# Altium PCB CANable.PcbDoc
Units mil, origin at the board's own origin, x right, y up, seen from the top; angles counter-clockwise.
Board outline 1203 x 996.39 mil, 2 copper layers (Top Layer, Bottom Layer); 27 components, 18 nets, 121 pads, 17 vias.
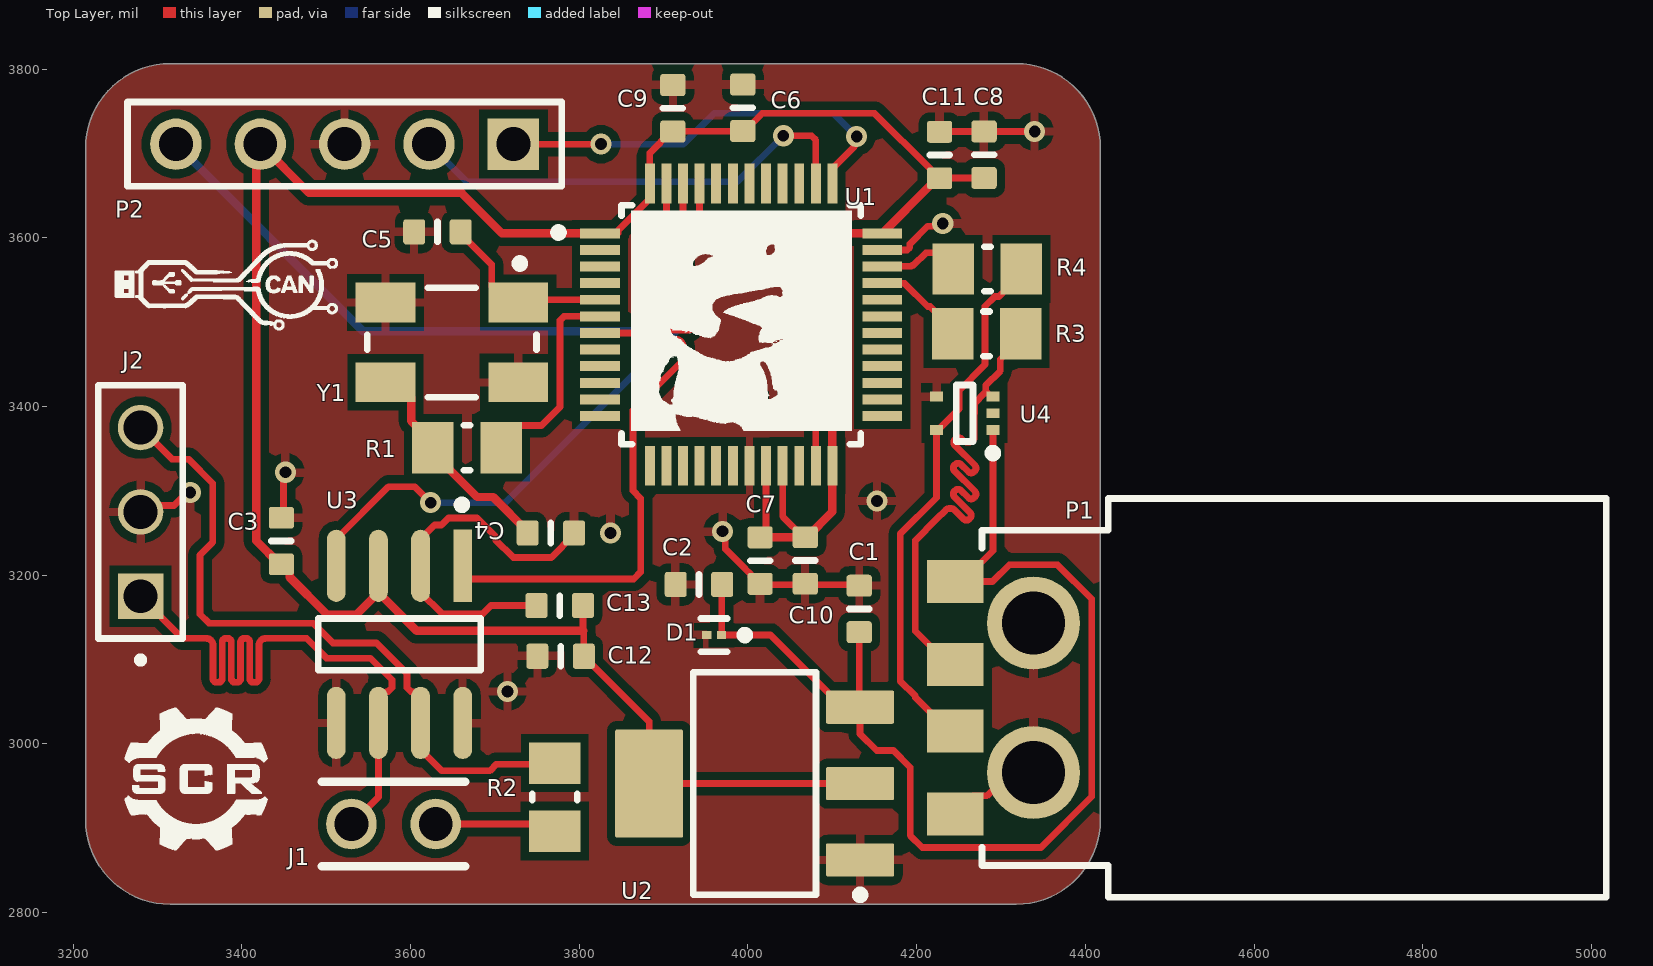
[diagram p0: Top Layer view]
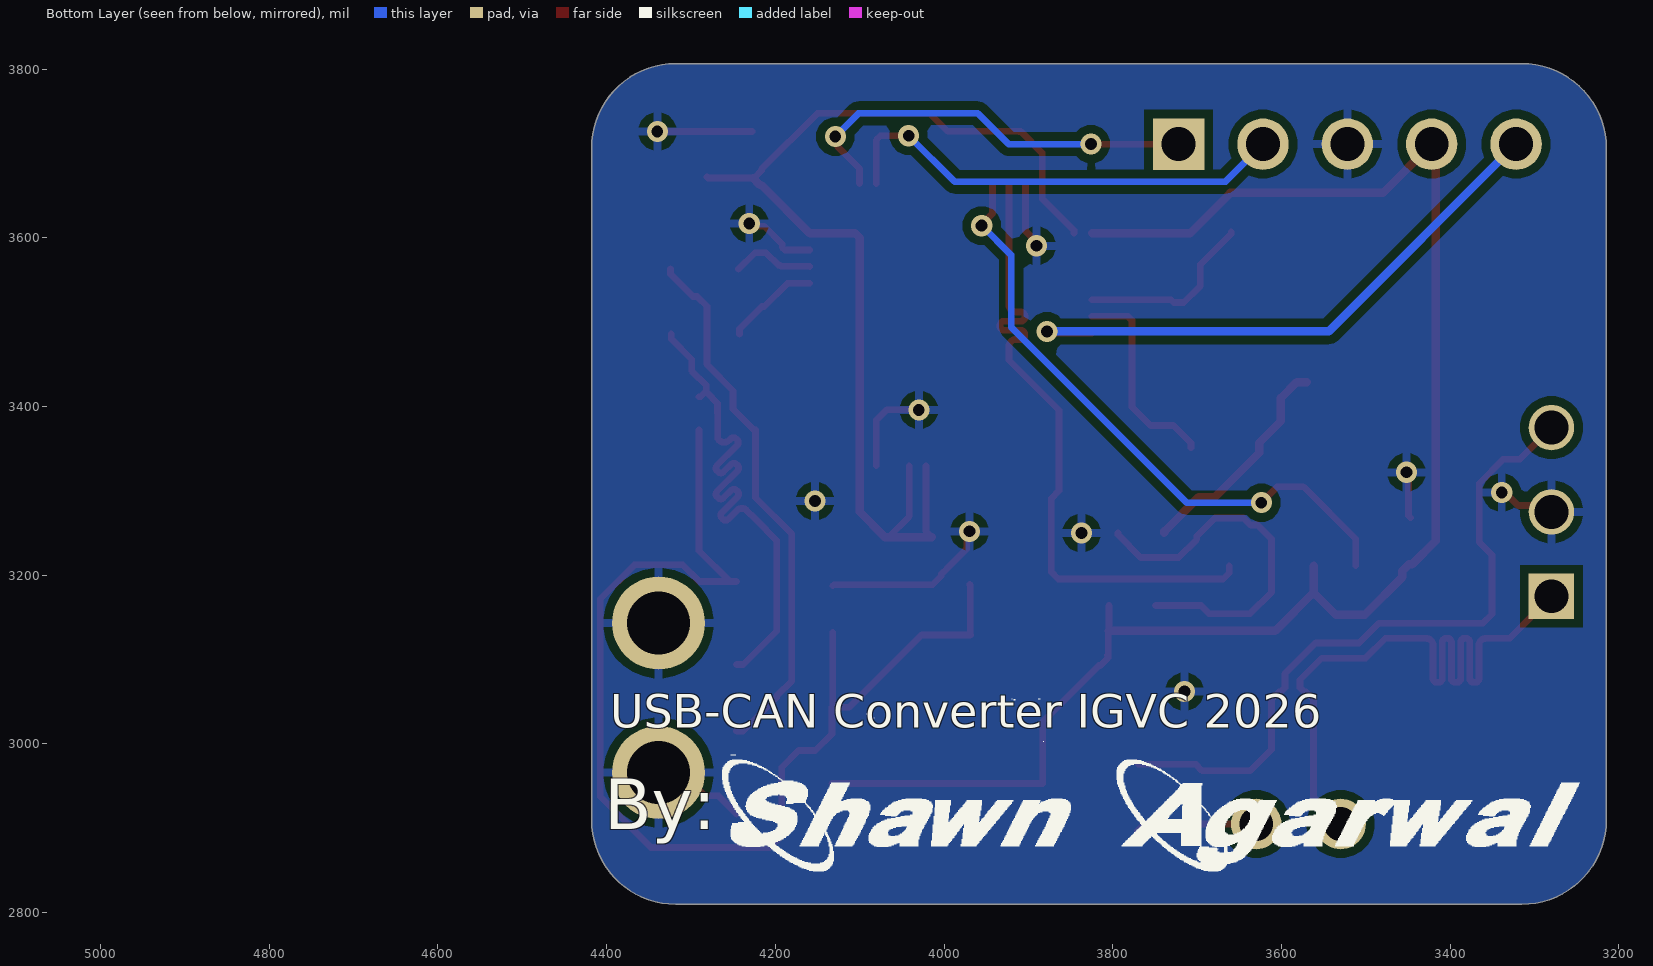
[diagram p1: Bottom Layer view, seen from below]
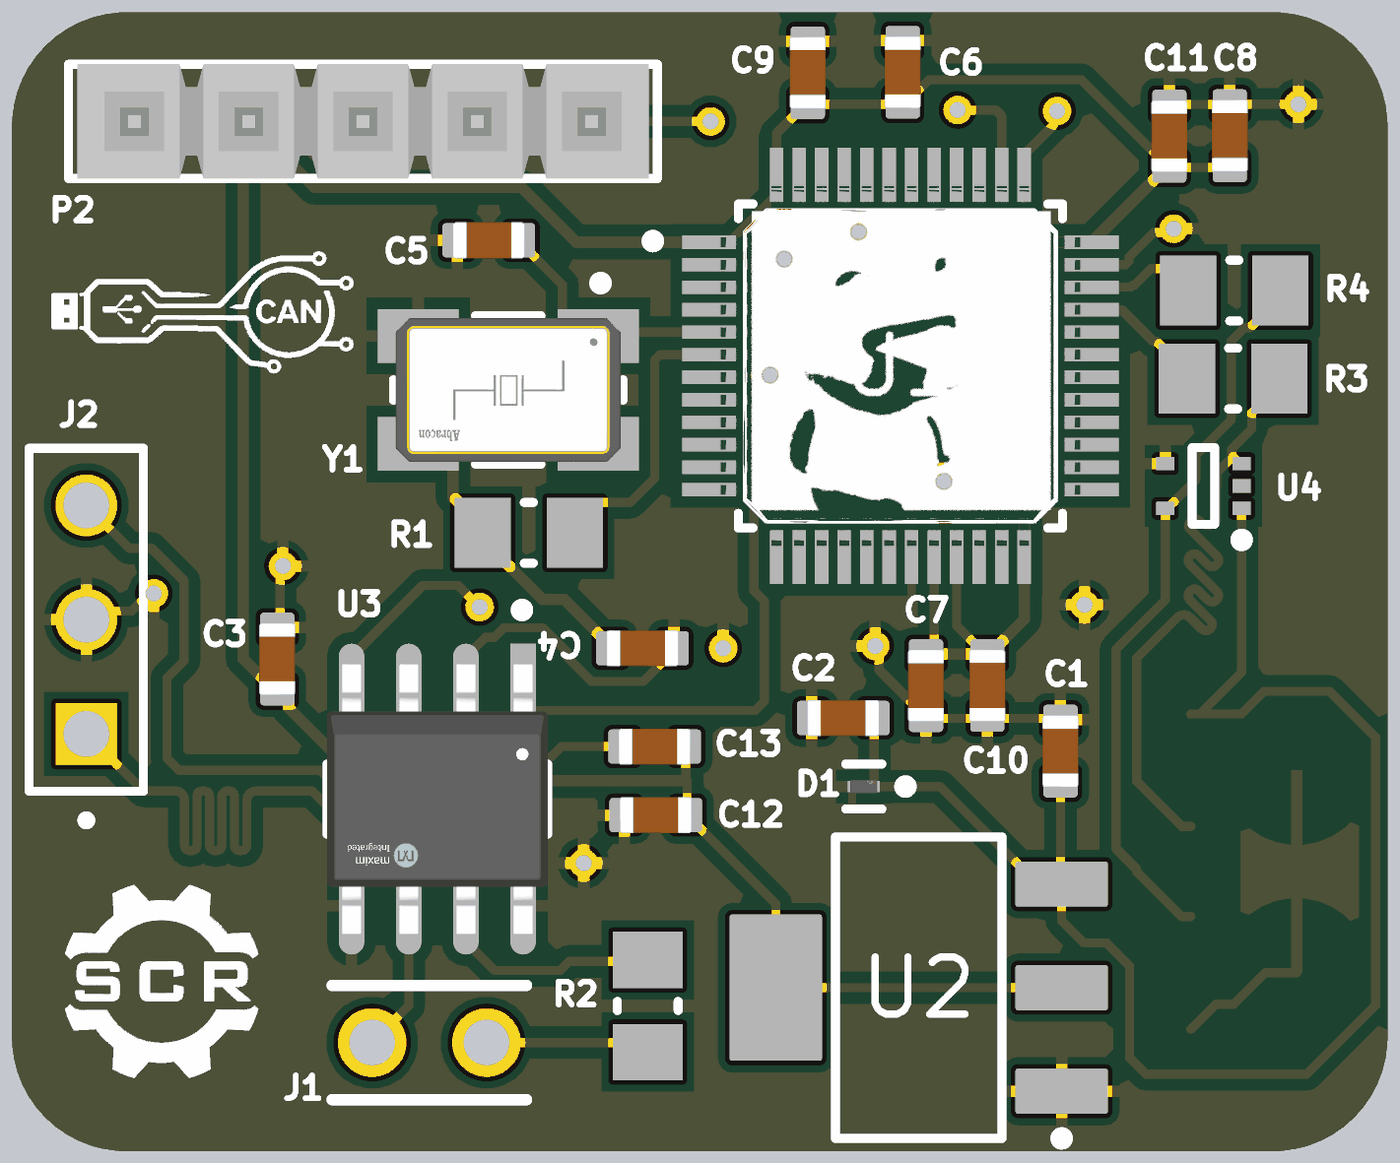
[diagram p2: 3D render of the assembled board from above, using the file's embedded part models]

## Layer stack, top to bottom
Top Solder: solder mask 0.4, Solder Resist, Dk 3.5
Top Layer: signal copper 1.4
Dielectric 1: dielectric 12.6, FR-4, Dk 4.8
Bottom Layer: signal copper 1.4
Bottom Solder: solder mask 0.4, Solder Resist, Dk 3.5

## Board outline
3215,2910 3215,3706.39 cw(c3315,3706.39) 3315,3806.39 4318,3806.39 cw(c4318,3706.39) 4418,3706.39 4418,2910 cw(c4318,2910) 4318,2810 3315,2810 cw(c3315,2910)

## Design rules (kind name [scope] priority, off if disabled: settings)
Clearance [All] p1: gap=10 ignorepadtopadclearanceinfootprint=FALSE
DiffPairsRouting [All] p1: maxlimit=10 minlimit=10 mostfreqgap=10 toplayer_minwidth=8 toplayer_maxwidth=12 toplayer_prefwidth=8 bottomlayer_minwidth=8 bottomlayer_maxwidth=12 bottomlayer_prefwidth=8 maxuncoupledlength=500
HoleSize [All] p1: absolutevalues=TRUE maxlimit=50 minlimit=1 maxpercent=80.000 minpercent=20.000
PolygonConnect [All] p1: connectstyle=Relief reliefconductorwidth=10 reliefentries=4 polygonreliefangle="90 Angle" airgapwidth=10
RoutingVias [All] p1: holewidth=28 width=50 viastyle="Through Hole" minholewidth=28 minwidth=50 maxholewidth=28 maxwidth=50
SolderMaskExpansion [All] p1: expansion=4 istentingtop=FALSE
SupplyNets "Schematic Supply Nets_2" [InNet('VBUS')] p1: voltage=0.000
SupplyNets "Schematic Supply Nets_1" [InNet('+3.3')] p2: voltage=0.000
SupplyNets "Schematic Supply Nets" [InNet('GND')] p3: voltage=0.000
Width [All] p1: maxlimit=10 minlimit=8 preferedwidth=8 minimp=50.000000 maximp=50.000000 favimp=50.000000 checkconnectedcopper=TRUE
28 further rules are at their usual default settings.

## Classes and differential pairs
component class U_Voltage_Regulator: C1 C2 C12 C13 U2
component class U_Microcontroller: C4 C5 C6 C7 C8 C9 C10 C11 R1 R3 R4 U1 Y1
component class U_Input_Output: D1 D2 J2 P2 U4
component class U_CAN_Transceiver: C3 J1 R2
differential pair NewDifferentialPair3: +NetU1_45 -NetU1_46
differential pair NewDifferentialPair2: +CANH -CANL
differential pair NewDifferentialPair1: +NetR4_2 -NetR3_2
differential pair D_USB: +D_USB_P -D_USB_N

## Components (designator, comment, footprint, x,y, rotation, side; value= is the part's Value field where it differs from the comment)
C1 "0.1uF" CAPC0603(1608)100_L 4132,3160 r90 top
C2 "10uF" CAPC0603(1608)100_L 3942,3189 r180 top
C3 "100nF" CAPC0603(1608)100_L 3447,3240.56 r270 top
C4 "22pF" CAPC0603(1608)100_L 3766.44,3250 r0 top
C5 "22pF" CAPC0603(1608)100_L 3632,3607 r180 top
C6 "100nF" CAPC0603(1608)100_L 3994,3754 r90 top
C7 "100nF" CAPC0603(1608)100_L 4014.42,3217.34 r270 top
C8 "100nF" CAPC0603(1608)100_L 4280.09,3698.49 r90 top
C9 "100nF" CAPC0603(1608)100_L 3911,3753.56 r90 top
C10 "100nF" CAPC0603(1608)100_L 4068,3217.44 r270 top
C11 "100nF" CAPC0603(1608)100_L 4227.23,3698.09 r90 top
C12 "10uF" CAPC0603(1608)100_L 3778,3104 r180 top
C13 "0.1uF" CAPC0603(1608)100_L 3777,3164 r180 top
D1 "ESD441DPLR" FP-DPL0002A-MFG 3960,3129 r180 top
J1 "2x1 Header" "0.1\" Header 2x1-Footprint" 3630,2905 r270 top
J2 "CAN" "3 pin 2.54mm header-Footprint-1" 3330,3125 r90 top
P1 "629004113921" 629004113921 4647.58,3054.63 r90 top
P2 "TSW-105-05-L-S" SMTC-TSW-105-05-X-S 3722,3711 r180 top (schematic designator P1)
R1 "RES 0805" RESC2013X50X30ML20T20 3667,3351 r0 top
R2 "120" RESC2013X50X30ML20T20 3771,2937 r90 top
R3 "RES 0805" RESC2013X50X30ML20T20 4283,3486 r180 top
R4 "RES 0805" RESC2013X50X30ML20T20 4284,3563 r180 top
U1 "STM32G431CBT6" FP-LQFP48-5B-MFG 3992,3497 r0 top
U2 "REG1117-3.3" DCY0004A_M 4008,2953 r180 top
U3 "MAX3051ESA+" FP-S8-4-IPC_B 3587,3118 r270 top
U4 "TPD2E001DRLRG4" DRL0005A_L 4257,3392 r180 top
Y1 "ABM3B-8.000MHZ-B2-T" FP-ABM3B-MFG 3649,3476 r180 top

## Footprints (in the part's own frame and the unit in brackets; to place one, negate y for a bottom-side part, rotate by r counter-clockwise, add the part's x,y. Pads: shape width x height; smd on the part's side, far side on the other; paste and mask are expansions set on the pad)
"0.1\" Header 2x1-Footprint" [mil]
  round 60 hole 40: 1(0,0) 2(0,-100)
  silkscreen extent -50,-135 50,35
"3 pin 2.54mm header-Footprint-1" [mm]
  rect 1.37x1.37 hole 1.02: 1(1.27,1.27)
  round 1.37 hole 1.02: 2(3.81,1.27) 3(6.35,1.27)
  silkscreen extent -0.75,0 7.62,2.54
629004113921 [mm] "USB 2.0 Plug Type A SMT with Clip"
  rect 1.3x1.7 smd: 1(3.5,10.2) 2(1,10.2) 3(-1,10.2) 4(-3.5,10.2)
  round 2.8 hole 1.9: Shell(-2.25,7.85) Shell(2.25,7.85)
  silkscreen extent -6,-9.4 6,9.4, body extent -6,-9.4 6,10.4, height 2.25
CAPC0603(1608)100_L [mm] "Chip Capacitor, Body 1.6x0.8mm, Height 1.0mm, IPC High Density"
  rrect25% 0.66x0.76 smd: 1(-0.7,0) 2(0.7,0)
  silkscreen extent 0,-0.3 0,0.3, body extent -0.8,-0.4 0.8,0.4, height 0.95
DCY0004A_M [mm] "SOT223, 4-Leads, Body 6.7x3.7mm, Pitch 2.3mm, IPC Low Density"
  rrect10% 2.05x1 smd: 1(-3.175,2.3) 2(-3.175,0) 3(-3.175,-2.3)
  rrect5% 2.05x3.25 smd: 4(3.175,0)
  silkscreen extent -3.3,-3.35 1.85,3.47
DRL0005A_L [mm] "SOT23, 5-Leads, Body 1.7x1.3mm, Pitch 0.5mm, IPC High Density"
  rect 0.4x0.3 smd: 1(-0.85,0.5) 2(-0.85,0) 3(-0.85,-0.5) 4(0.85,-0.5) 5(0.85,0.5)
  silkscreen extent -0.98,-0.85 0.25,1.32, body extent -0.65,-0.85 0.65,0.85, height 0.6
FP-ABM3B-MFG [mm]
  rect 1.8x1.2 smd paste+0 mask+0: 1(-2,-1.2) 2(2,-1.2) 3(2,1.2) 4(-2,1.2)
  silkscreen extent -2.55,-2.5 2.55,1.65, body extent -3,-1.9 3,1.9, height 0.25
FP-DPL0002A-MFG [mm]
  rect 0.28x0.25 smd paste+0 mask+0: 1(-0.22,0) 2(0.22,0)
  silkscreen extent -1.05,-0.5 0.4,0.5, body extent -0.46,-0.28 0.46,0.28, height 0.25
FP-LQFP48-5B-MFG [mm]
  rect 1.2x0.3 smd paste+0 mask+0: 1(-4.25,2.75) 2(-4.25,2.25) 3(-4.25,1.75) 4(-4.25,1.25) 5(-4.25,0.75) 6(-4.25,0.25) 7(-4.25,-0.25) 8(-4.25,-0.75) 9(-4.25,-1.25) 10(-4.25,-1.75) 11(-4.25,-2.25) 12(-4.25,-2.75) 25(4.25,-2.75) 26(4.25,-2.25) 27(4.25,-1.75) 28(4.25,-1.25) 29(4.25,-0.75) 30(4.25,-0.25) 31(4.25,0.25) 32(4.25,0.75) 33(4.25,1.25) 34(4.25,1.75) 35(4.25,2.25) 36(4.25,2.75)
  rect 0.3x1.2 smd paste+0 mask+0: 13(-2.75,-4.25) 14(-2.25,-4.25) 15(-1.75,-4.25) 16(-1.25,-4.25) 17(-0.75,-4.25) 18(-0.25,-4.25) 19(0.25,-4.25) 20(0.75,-4.25) 21(1.25,-4.25) 22(1.75,-4.25) 23(2.25,-4.25) 24(2.75,-4.25) 37(2.75,4.25) 38(2.25,4.25) 39(1.75,4.25) 40(1.25,4.25) 41(0.75,4.25) 42(0.25,4.25) 43(-0.25,4.25) 44(-0.75,4.25) 45(-1.25,4.25) 46(-1.75,4.25) 47(-2.25,4.25) 48(-2.75,4.25)
  silkscreen extent -5.62,-3.6 3.6,3.6, body extent -4.95,-4.95 4.95,4.95, height 0.25
FP-S8-4-IPC_B [mil]
  rect 85.59x22.32 smd paste+0 mask+0: 1(-93.15,75)
  rrect100% 85.59x22.32 smd paste+0 mask+0: 2(-93.15,25) 3(-93.15,-25) 4(-93.15,-75) 5(93.15,-75) 6(93.15,-25) 7(93.15,25) 8(93.15,75)
  silkscreen extent -170,-96 31,96, body extent -146,-106 146,106, height 10
RESC2013X50X30ML20T20 [mm] "Chip Resistor, 2-Leads, Body 2.00x1.25mm, IPC Low Density"
  rect 1.25x1.55 smd: 1(-1.025,0) 2(1.025,0)
  silkscreen extent -0.1,-0.67 0.1,0.67, body extent -1.1,-0.72 1.1,0.72, height 0.5
SMTC-TSW-105-05-X-S [mm] ".025 SQ Post Terminal Strip Assembly, 1x5 Pins, Vertical, 2.54mm Pitch, Male"
  rect 1.55x1.55 hole 1.02: 1(0,0)
  round 1.55 hole 1.02: 2(2.54,0) 3(5.08,0) 4(7.62,0) 5(10.16,0)
  silkscreen extent -1.46,-1.27 11.62,1.27, body extent -1.27,-1.27 11.43,1.27, height 5.21

## Part data
C1 C2 C3 C4 C5 C6 C7 C8 C9 C10 C11 C12 C13: library part CMP-001-00083-4, "GENERIC CAPACITOR 0805 or 0603(1608)"
D1: library part CMP-00370-140306675-1, "ESD441DPLR 1-pF, 5.5-V, 30-KV ESD protection device in 0201 package 2-X2SON -40 to 125", Ambient Temperature Range High=150°C, Breakdown Voltage=6V, Capacitance=1pF, Clamping Voltage=3.8V, Manufacturer Lifecycle Status=ACTIVE, Max Operating Temperature=125°C, Min Operating Temperature=-40°C, Peak Pulse Current=6A, Peak Pulse Power=45W, Reverse Standoff Voltage=5.5V, Direction=Unidirectional, Height=320µm, Length=600µm, Lifecycle Status=Production, NexarPartId=140306675, Number of Channels=1, Number of Pins=2, Thickness=300µm, Width=300µm
J1: library part CMP-002-00002-10, "Board Connector, 2 Contact(s), 1 Row(s), Male, Straight, 0.1 inch and 0.079 inch Pitch, Solder Terminal, Locking, Black Insulator", Connector Type="BOARD CONNECTOR", Mounting Technology=Board, RoHS Compliant=Yes
J2: library part CMP-002-00074-2, "3 pin header for jumpers connectors 2.54mm pitch."
P1: library part CMP-1502-03242-2, Contact Resistance=20mΩ, Current Rating=1.5A, Insulation Resistance=1GΩ, Max Operating Temperature=105°C, Min Operating Temperature=-40°C, Operating Supply Voltage=30V, Connector Type=USB, Contact Plating=Gold, Features=Shielded, Gender=Male, Lead Free="Lead Free", Length=18.8mm, Mount="Horizontal, Surface Mount", NexarPartId=19991169, Number of Contacts=4, Number of Pins=4, Orientation=Horizontal, REACH SVHC=Unknown, RoHS=Compliant, Termination=SMD/SMT, USB Standard="USB 2.0"
P2: library part CMP-1024-00366-1, "0.025\" SQ Post Header, Through-hole, Vertical, -55 to 125 degC, 2.54 mm Pitch, 5-Pin, Male, RoHS", Manufacturer=Samtec, Temperature Range="-55 to 125 degC", ComponentLink1Description="Manufacturer URL", ComponentLink1URL=http://www.samtec.com, ComponentLink2Description=Datasheet, ComponentLink2URL=http://www.samtec.com/documents/webfiles/pdf/TSW_TH.PDF, ComponentLink3Description="Package Specification", ComponentLink3URL=http://www.samtec.com/documents/webfiles/cpdf/TSW-XXX-XX-XXX-X-XX-XXX-MKT.pdf, DatasheetVersion=F-214, Mounting Technology=Through-hole, Orientation=Vertical, PackageDescription=".025[0.64] SQ. Post Terminal Strip Assembly", PackageReference=TSW-105-05-X-S, PackageVersion="DM, 8/1988", PartNumber=TSW-105-05-L-S, Pitch="2.54 mm", RoHS=True
R1 R2 R3 R4: library part CMP-009-00177-4, "Surface Mount 0805 Resistor"
U1: library part CMP-12105-000030-1, "MAINSTREAM ARM CORTEX-M4+ MCU 17", Ambient Temperature Range High=+85°C, Ambient Temperature Range Low=-40°C, Frequency=170MHz, Manufacturer=STMicroelectronics, Max Junction Temp=+105°C, Max Supply Voltage=3.6V, Min Supply Voltage=1.62V, Package=LQFP48-5B, Temperature="-40°C to +85°C", Automotive=No, Category=IC, ComponentLink2Description=Datasheet, ComponentLink2URL=https://www.st.com/resource/en/datasheet/stm32g431cb.pdf, Core Architecture="Arm Cortex-M4", Data Bus Width=32bits, Device Class L1="Integrated Circuits (ICs)", Device Class L2="Embedded Processors and Controllers", Device Class L3=Microcontrollers, Digikey Description="MAINSTREAM ARM CORTEX-M4+ MCU 17", Height=1.6mm, Interface=I2C,SPI,UART,USART,CAN,USB,LIN,IrDA,I2S, Lead Free=Yes, Manufacturer Part Number=STM32G431CBT6, Memory Size=128KBytes, Memory Type=FLASH, Number of A/D Converters=1, Number of ADC Channels=17, Number Of Cores=1, Number of I2C Channels=3, Number of I/Os=38, Number of PWM Channels=31, Number of SPI Channels=3, Number of Timers/Counters=14, Number of UART Channels=4, Number Of Usb Channels=1, Octopart=https://octopart.com/stm32g431cbt6-stmicroelectronics-98835224, RAM Size=32KBytes, RoHS=TRUE, Standoff Height=0.05mm, Temperature Range High=+85°C, Temperature Range Low=-40°C
U2: library part CMP-019-00049-4, "LDO Regulator Pos 3.3V 0.8A 4-Pin(3+Tab) SOT-223 Rail"
U3: library part CMP-015-00014-1, "MAX3051 Series 3.3 V 1 Mbps Low-Supply-Current CAN Transceiver - SOIC-8"
U4: library part CMP-0326-00050-2, "Low-Capacitance + / - 15 kV ESD-Protection Array for High-Speed Data Interfaces, 2 Channels, -40 to +85 degC, 5-pin SOT (DRL), Green (RoHS & no Sb/Br)", Breakdown Voltage(Min)(V)=11, IO Capacitance(Typ)(pF)=1.5, IO Leakage Current(nA)=1, Manufacturer="Texas Instruments", ComponentLink1Description="Manufacturer URL", ComponentLink1URL=http://www.ti.com/, ComponentLink2Description=Datasheet, ComponentLink2URL=http://www.ti.com/general/docs/lit/getliterature.tsp?genericPartNumber=TPD2E001&fileType=pdf, ComponentLink3Description="URL Link1", ComponentLink3URL=SamplesURL:http://www.ti.com/product/tpd2e001#samples, DatasheetVersion=SLLS684F, Eco-Plan="Green (RoHS & no Sb/Br)", IEC 61000-4-2 Air-Gap(+/- kV)=15, IEC 61000-4-2 Contact(+/- kV)=8, Mounting Technology="Surface Mount", PackageDescription="5-Pin Plastic Small Outline, Flat Lead 0.5 mm Pitch", PackageReference=DRL0005A, PackageVersion="revD, Aug-2007", PartNumber=TPD2E001DRLRG4, SubFamily="ESD Solution", USB High Speed=TRUE
Y1: library part CMP-1688-00002-2, "Crystal 8MHz ±20ppm 18pF SMD-4 5mm x 3.2mm", Case/Package=CSMD, ESR (Equivalent Series Resistance)=200R, Frequency=8MHz, Frequency Stability=50ppm, Frequency Tolerance=20ppm, Load Capacitance=18pF, Max Operating Temperature=70°C, Min Operating Temperature=-20°C, Operating Frequency="8 MHz", Package Quantity=1000, Resistor Type=Ceramic, Depth=3.2mm, Height=0.043inch, Lead Free="Lead Free", Length=5mm, Mount="Surface Mount", Number of Pins=4, Packaging="Tape and Reel", Series=ABM3B, Series Resistance=200R, Termination=SMD/SMT, Tolerance=20ppm, Width=0.126inch

## Via types
v1: diameter 25, hole 14, Top Layer to Bottom Layer, 17 vias

## Nets (pads, with @x,y where several pads share a name; then routed paths per layer and width w, separated by ;. In a path a pad name is that pad's centre, name@x,y a point inside that pad or via, vN(x,y) a via of type N, cw(c..) or ccw(c..) an arc to the next point about the centre after c; other vN are vias at no path point)
+3.3: C3.2 C6.1 C7.1 C8.1 C9.1 C10.1 C11.1 C12.1 C13.1 P2.4 U1.1 U1.20 U1.21 U1.24 U1.36 U1.48 U2.2 U2.4 U3.3 | length 3225.6
  Top Layer w8: C13.1 3804.56,3134.08 3804.6,3134.04 3805.56,3133.08 C12.1 C12.1@3806.56,3105 ; C12.1@3805.56,3102.04 3814.56,3093.04 3816.52,3093.04 3883,3026.56 U2.4 U2.2 ; U1.1@3846,3605.49 3846,3608.87 3883.73,3646.61 U1.48 ; U1.48@3883.73,3662.35 U1.48 ; C7.1 4021.53,3252.01 U1.20 ; U1.21 4041.21,3269.83 C10.1@4066.04,3245 ; C11.1@4226.71,3670.73 4279.89,3670.73 C8.1@4281.13,3671.96 ; C11.1 4225.27,3670.53 4216.27,3679.53 4216.27,3681.49 4150.26,3747.5 4017.02,3747.5 3995.74,3726.22 3911.22,3726.22 C9.1 3909.04,3726 3883.73,3700.69 U1.48
  Top Layer w10: U3.3 U3.3@3562,3179.51 ; 3804.6,3134.04 3607.47,3134.04 U3.3@3562,3179.51 ; U1.1 3708.56,3605.27 3660.58,3653.25 3479.75,3653.25 P2.4 3417.04,3706.04 3417.04,3241 3445.04,3213 C3.2 3448.96,3213 3456.96,3205 3456.96,3197.56 3501.16,3153.36 3535.84,3153.36 U3.3@3562,3179.51 ; C7.1 4014.47,3244.95 C10.1 C10.1 ; C10.1@4069.96,3245 4100.27,3275.31 U1.24 4100.27,3600.27 4105.27,3605.27 U1.36 4216.59,3662.53 4218.51,3662.53 C11.1@4226.71,3670.73
CANH: J2.3 R2.2 U3.7 | length 820.3
  Top Layer w8: J2.3 3317.41,3337.59 3336.88,3337.59 3365.5,3308.98 3365.5,3239 3350.5,3224 3350.5,3153.69 3361.07,3143.12 3484.53,3143.12 3507.97,3119.68 3559.84,3119.68 3596,3083.52 3596,3066.61 3600.69,3061.92 3602.69,3061.92 3612,3052.61 3612,2993.21 3637.16,2968.05 3694.06,2968.05 3702.01,2976 3769.65,2976 R2.2
CANL: J1.2 J2.1 U3.6 | length 818.3
  Top Layer w8: J2.1 3329.88,3125.12 3343,3125.12 3357.9,3125.12 cw(c3357.9,3117.12) 3365.9,3117.12 3365.9,3077.35 ccw(c3370.26,3077.35) 3370.26,3072.99 3372.44,3072.99 ccw(c3372.44,3077.35) 3376.8,3077.35 3376.8,3120.76 cw(c3381.16,3120.76) 3381.16,3125.12 3383.34,3125.12 cw(c3383.34,3120.76) 3387.7,3120.76 3387.7,3077.35 ccw(c3392.06,3077.35) 3392.06,3072.99 3394.24,3072.99 ccw(c3394.24,3077.35) 3398.6,3077.35 3398.6,3120.76 cw(c3402.96,3120.76) 3402.96,3125.12 3405.14,3125.12 cw(c3405.14,3120.76) 3409.5,3120.76 3409.5,3077.35 ccw(c3413.86,3077.35) 3413.86,3072.99 3416.04,3072.99 ccw(c3416.04,3077.35) 3420.4,3077.35 3420.4,3117.12 cw(c3428.4,3117.12) 3428.4,3125.12 3456.74,3125.12 3477.08,3125.12 3500.51,3101.68 3552.38,3101.68 3578,3076.07 3578,3066.61 3573.31,3061.92 3571.31,3061.92 3562,3052.61 3562,2937 J1.2
CLK_IN: C5.1 U1.5 Y1.1 | length 217.2
  Top Layer w8: C5.1 3659.56,3605.04 3696.31,3568.29 3696.31,3542.87 3715.93,3523.24 Y1.1 3731.02,3526.53 U1.5
CLK_OUT: R1.2 U1.6 | length 245.6
  Top Layer w8: R1.2 3707.35,3356.91 3727.96,3377.51 3755.35,3377.51 3777.17,3399.34 3777.17,3502.16 3781.86,3506.84 U1.6
D_USB_N: P1.2 R3.1 U4.3 | length 641.2
  Top Layer w8: P1.2 4238.13,3094 4198.54,3133.59 4198.54,3241.38 4223.57,3266.41 4234.1,3276.95 cw(c4239.76,3271.29) 4245.42,3276.95 4255.63,3266.74 ccw(c4259.1,3270.2) 4262.57,3266.74 4263.34,3267.51 ccw(c4259.87,3270.97) 4263.34,3274.44 4245,3292.78 cw(c4248.47,3296.24) 4245,3299.71 4245.77,3300.48 cw(c4249.24,3297.02) 4252.71,3300.48 4261.29,3291.91 ccw(c4264.76,3295.37) 4268.23,3291.91 4269,3292.68 ccw(c4265.53,3296.15) 4269,3299.61 4245,3323.61 cw(c4248.47,3327.07) 4245,3330.54 4245.77,3331.31 cw(c4249.24,3327.85) 4252.71,3331.31 4261.29,3322.74 ccw(c4264.76,3326.2) 4268.23,3322.74 4269,3323.51 ccw(c4265.53,3326.98) 4269,3330.44 4245.59,3353.85 cw(c4249.06,3357.32) 4245.59,3360.79 4246.36,3361.56 cw(c4249.83,3358.09) 4253.3,3361.56 4254.92,3359.94 ccw(c4260.8,3365.9) 4268.23,3362.04 4268.23,3391.42 4268.59,3391.78 4268.59,3403.7 4281.26,3416.37 4281.92,3417.04 4281.92,3418.26 ; U4.3 4288.5,3411.69 4281.92,3418.26 ; R3.1 4323.35,3480.09 4299.25,3455.99 4299.25,3442.23 4281.92,3424.9 4281.92,3418.26
D_USB_P: P1.3 R4.1 U4.5 | length 641.1
  Top Layer w8: U4.5 4223.54,3291.84 4180.54,3248.84 4180.54,3074.7 4198.54,3056.7 4198.54,3054.85 4238.13,3015.26 P1.3 ; U4.5@4225.5,3372.32 4250.23,3397.04 4250.23,3418.67 4281.25,3449.69 4281.25,3518.81 4292.95,3530.51 4297.77,3530.51 4324.35,3557.09 R4.1
GND: C1.2 C2.2 C3.1 C4.2 C5.2 C6.2 C7.2 C8.2 C9.2 C10.2 C11.2 C12.2 C13.2 D1.2 J2.2 P1.4 P1.Shell P2.3 U1.19 U1.23 U1.35 U1.47 U2.1 U3.2 U3.5 U3.8 U4.4 Y1.2 Y1.4 | length 1268.5
  Top Layer w8: J2.2 3287.57,3282.57 3319.78,3282.57 3335.21,3298 v1(3339,3298) ; C3.1 3449.5,3270.62 3449.5,3319.5 v1(3452,3322) ; C13.2 3695.56,3164 3685.91,3154.36 3637.16,3154.36 3612,3179.51 U3.2 3612,3242.79 3628.71,3259.5 3636.59,3259.5 3645.04,3267.95 3678.96,3267.95 3700.47,3246.43 3700.47,3242.55 3721.99,3221.04 3767,3221.04 3794,3248.04 C4.2 ; v1(3890.39,3590.51) 3890.39,3595.11 3903.42,3608.13 U1.47 ; v1(3970,3252) 3973.25,3248.75 3973.25,3231.16 3996.56,3207.86 3996.56,3207.65 4003.46,3200.74 4003.46,3198.78 4013.57,3188.67 4130.89,3188.67 C1.2 ; v1(4030,3396) 4068.17,3396 4080.58,3383.58 U1.23 ; U1.35 4188.96,3585.58 4192.04,3588.66 4192.04,3592.57 4213.22,3613.75 4227.75,3613.75 v1(4231,3617) ; C11.2@4227.43,3725.85 4279.89,3725.85 C8.2 ; P1.4 4267.59,2938.43 4283.23,2938.43 4310.85,2966.05 P1.Shell@4338.52,2966.05 ; C8.2 v1(4340,3726)
  other v1: 3715,3062 3837,3250 4153,3288
NetC4_1: C4.1 R1.1 Y1.3 | length 266.7
  Top Layer w10: Y1.3 3582.07,3428.76 3600.69,3410.13 3600.69,3382.86 3626.65,3356.91 R1.1 3626.65,3345.09 3679.02,3292.72 3698.12,3292.72 3738.88,3251.96 C4.1
NetJ1_1: J1.1 R2.1 | length 144.5
  Top Layer w8: J1.1 3762.65,2905 R2.1
NetR3_2: R3.2 U1.33 | length 111.7
  Top Layer w8: U1.33 4182.43,3546.21 4182.65,3545.99 4185.74,3545.99 4213.24,3518.49 4216.06,3518.49 4242.65,3491.91 R3.2
NetR4_2: R4.2 U1.34 | length 99
  Top Layer w8: U1.34 4159.54,3566.12 4193.48,3566.12 4194.94,3567.58 4196.42,3567.58 4210.97,3582.13 4224.52,3582.13 R4.2
NetU1_45: U1.45 U3.4 | length 749.9
  Top Layer w8: U3.4 3512,3242.79 3574.21,3305 3605,3305 v1(3624,3286) ; U1.45 3942.79,3628.7 3955.39,3616.09 v1(3955.39,3614.51)
  Bottom Layer w8: v1(3624,3286) 3712.48,3286 3920.56,3494.08 3920.56,3579.67 v1(3955.39,3614.51)
  other v1: 3955.52,3614.16
NetU1_46: U1.46 U3.1 | length 792
  Top Layer w8: U3.1 3662,3202.65 3669.16,3195.49 3864.76,3195.49 3872.96,3203.69 3872.96,3291.12 3863.83,3300.26 3863.83,3395.54 3923.1,3454.82 3923.1,3471.4 ccw(c3915.1,3471.4) 3915.1,3479.4 3909.41,3479.4 cw(c3909.41,3484.3) 3904.5,3484.3 3904.5,3485.39 cw(c3909.41,3485.39) 3909.41,3490.3 3928.91,3490.3 ccw(c3928.91,3495.2) 3933.81,3495.2 3933.81,3496.29 ccw(c3928.91,3496.29) 3928.91,3501.2 3908.96,3501.2 cw(c3908.96,3506.1) 3904.06,3506.1 3904.06,3507.19 cw(c3908.96,3507.19) 3908.96,3512.1 3915.1,3512.1 ccw(c3915.1,3520.1) 3923.1,3520.1 3923.1,3535 U1.46
RESET: P2.5 U1.7 | length 702
  Top Layer w8: U1.7 3876.16,3487.16 v1(3878,3489)
  Bottom Layer w10: P2.5 3544,3489 v1(3878,3489)
SWCLK: P2.2 U1.38 | length 553.2
  Top Layer w8: v1(4042,3721) 4075.31,3721 4080.58,3715.73 U1.38
  Bottom Layer w8: P2.2 3666.51,3666.49 3987.49,3666.49 v1(4042,3721)
SWDIO: P2.1 U1.37 | length 501.1
  Top Layer w8: P2.1 v1(3826,3711) ; U1.37 4100.27,3682.04 4125.75,3707.52 4125.75,3716.75 v1(4129,3720)
  Bottom Layer w8: v1(3826,3711) 3923.54,3711 3960.04,3747.5 4101.5,3747.5 v1(4129,3720)
VBUS: C1.1 C2.1 D1.1 P1.1 U2.3 U4.1 | length 1399.8
  Top Layer w8: C2.1 3969.11,3188.55 3969.11,3129.45 D1.1 4026.88,3129 4112.33,3043.55 U2.3 ; C1.1 4132,3044.55 U2.3 ; P1.1 P1.1@4253.87,3192.43 ; U4.1 4290.46,3229.02 P1.1@4253.87,3192.43 ; U2.3 4133,3011.87 4152.77,2992.09 4172.59,2992.09 4192.37,2972.32 4192.37,2891.61 4206.74,2877.24 4347.46,2877.24 4407.64,2937.42 4407.64,3171.84 4367.15,3212.33 4309.89,3212.33 4289.98,3192.43 P1.1@4253.87,3192.43
pads on no net: U1.2 U1.3 U1.4 U1.8 U1.9 U1.10 U1.11 U1.12 U1.13 U1.14 U1.15 U1.16 U1.17 U1.18 U1.22 U1.25 U1.26 U1.27 U1.28 U1.29 U1.30 U1.31 U1.32 U1.39 U1.40 U1.41 U1.42 U1.43 U1.44 U4.2

## Polygon pours and split planes (outlines as drawn)
GND on Bottom Layer "GND_L02_P001" (solid, pour order 1): 3215,2910 3215,3706.39 cw(c3315,3706.39) 3315,3806.39 4318,3806.39 cw(c4318,3706.39) 4418,3706.39 4418,2910 cw(c4318,2910) 4318,2810 3315,2810 cw(c3315,2910)
GND on Top Layer "GND_L01_P000" (solid, pour order 0): 3215,2910 3215,3706.39 cw(c3315,3706.39) 3315,3806.39 4318,3806.39 cw(c4318,3706.39) 4418,3706.39 4418,2910 cw(c4318,2910) 4318,2810 3315,2810 cw(c3315,2910)

## Silkscreen, mask and mechanical layers (free items; w line width, h text height)
Top Overlay:
  drawing of 24 lines, arcs and shapes, not listed
Bottom Overlay:
  drawing of 30 lines, arcs and shapes, not listed
  text "USB-CAN Converter IGVC 2026" at 4396,3019 h40
  text "By:" at 4403,2898.99 h60
Mechanical 1:
  the board outline again, w10

## Text inside footprints (layer, text, board x,y; h text height)
P1: Top 3D Body "PCB Edge" at 4468.44,2975.89 h20 r90